# Altium PCB Mega16_SMT.PcbDoc (part 1 of 2)
Units mil, origin at the board's own origin, x right, y up, seen from the top; angles counter-clockwise.
Board outline 3000 x 4260 mil, 2 copper layers (Top Layer, Bottom Layer); 58 components, 55 nets, 251 pads, 26 vias.
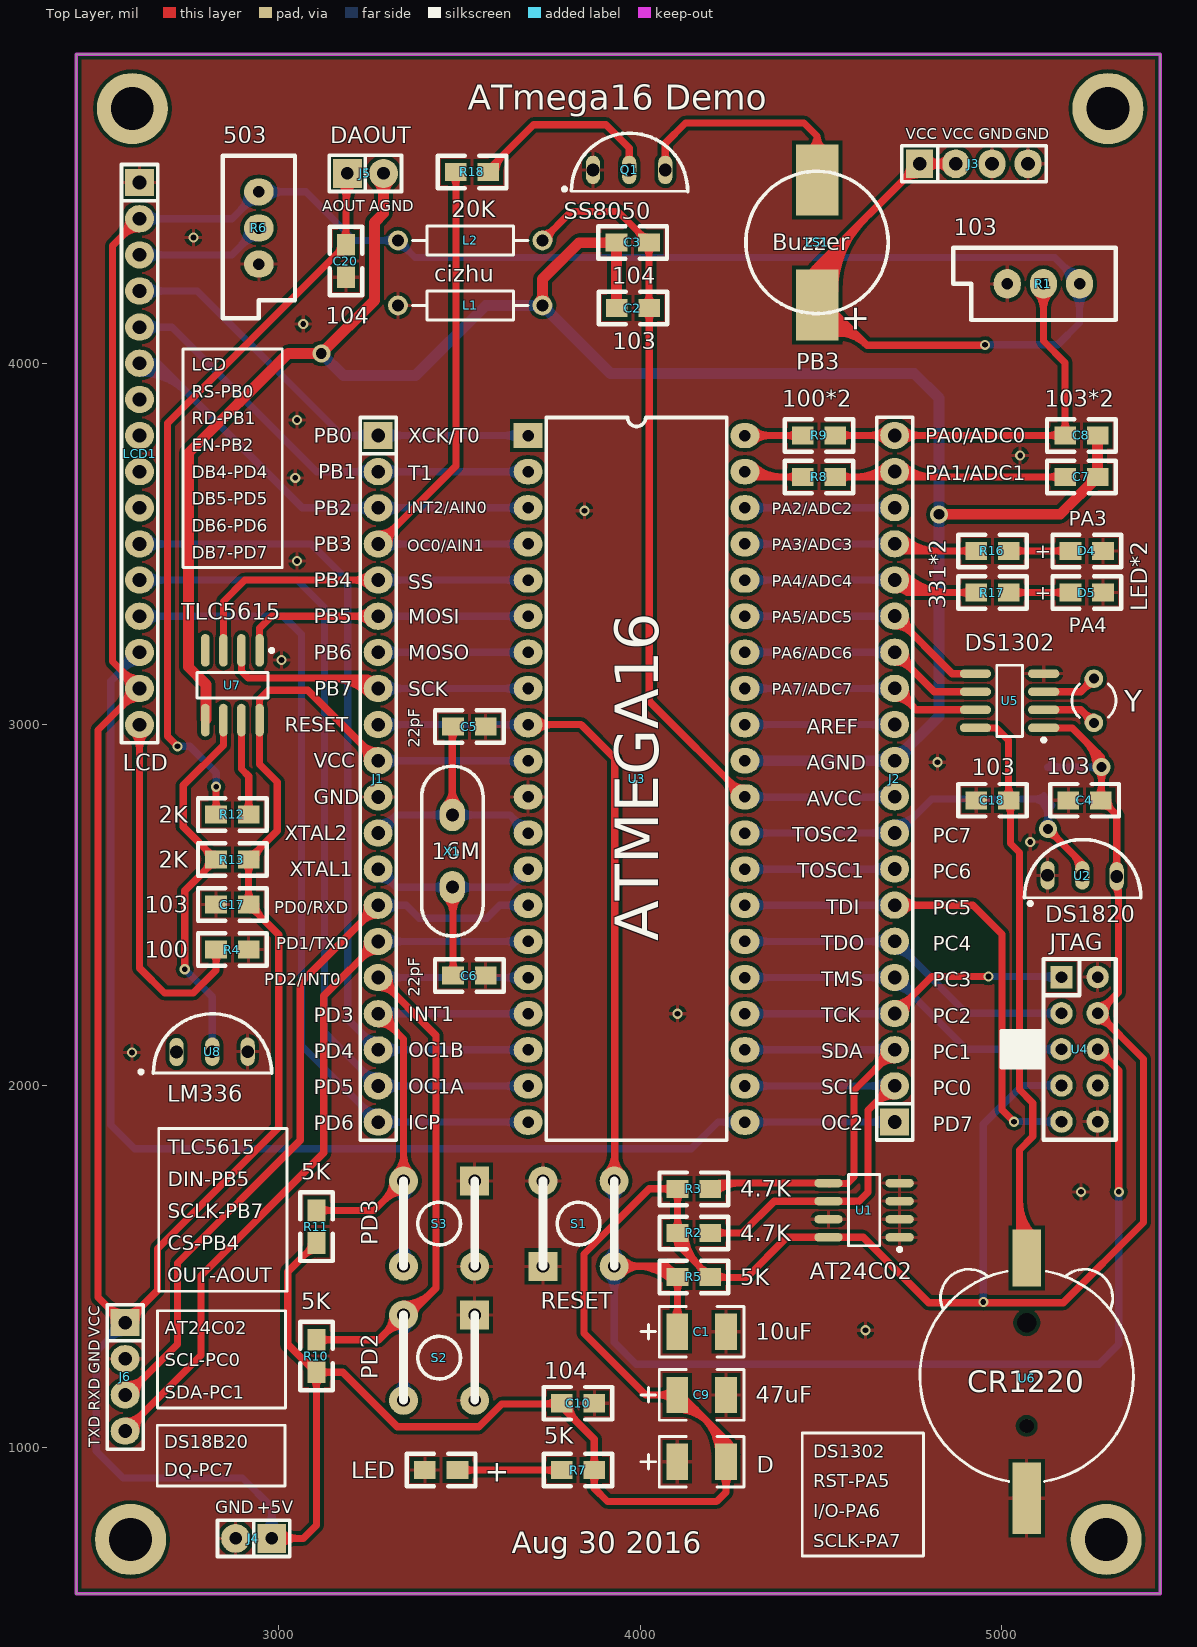
[diagram p0: Top Layer view]
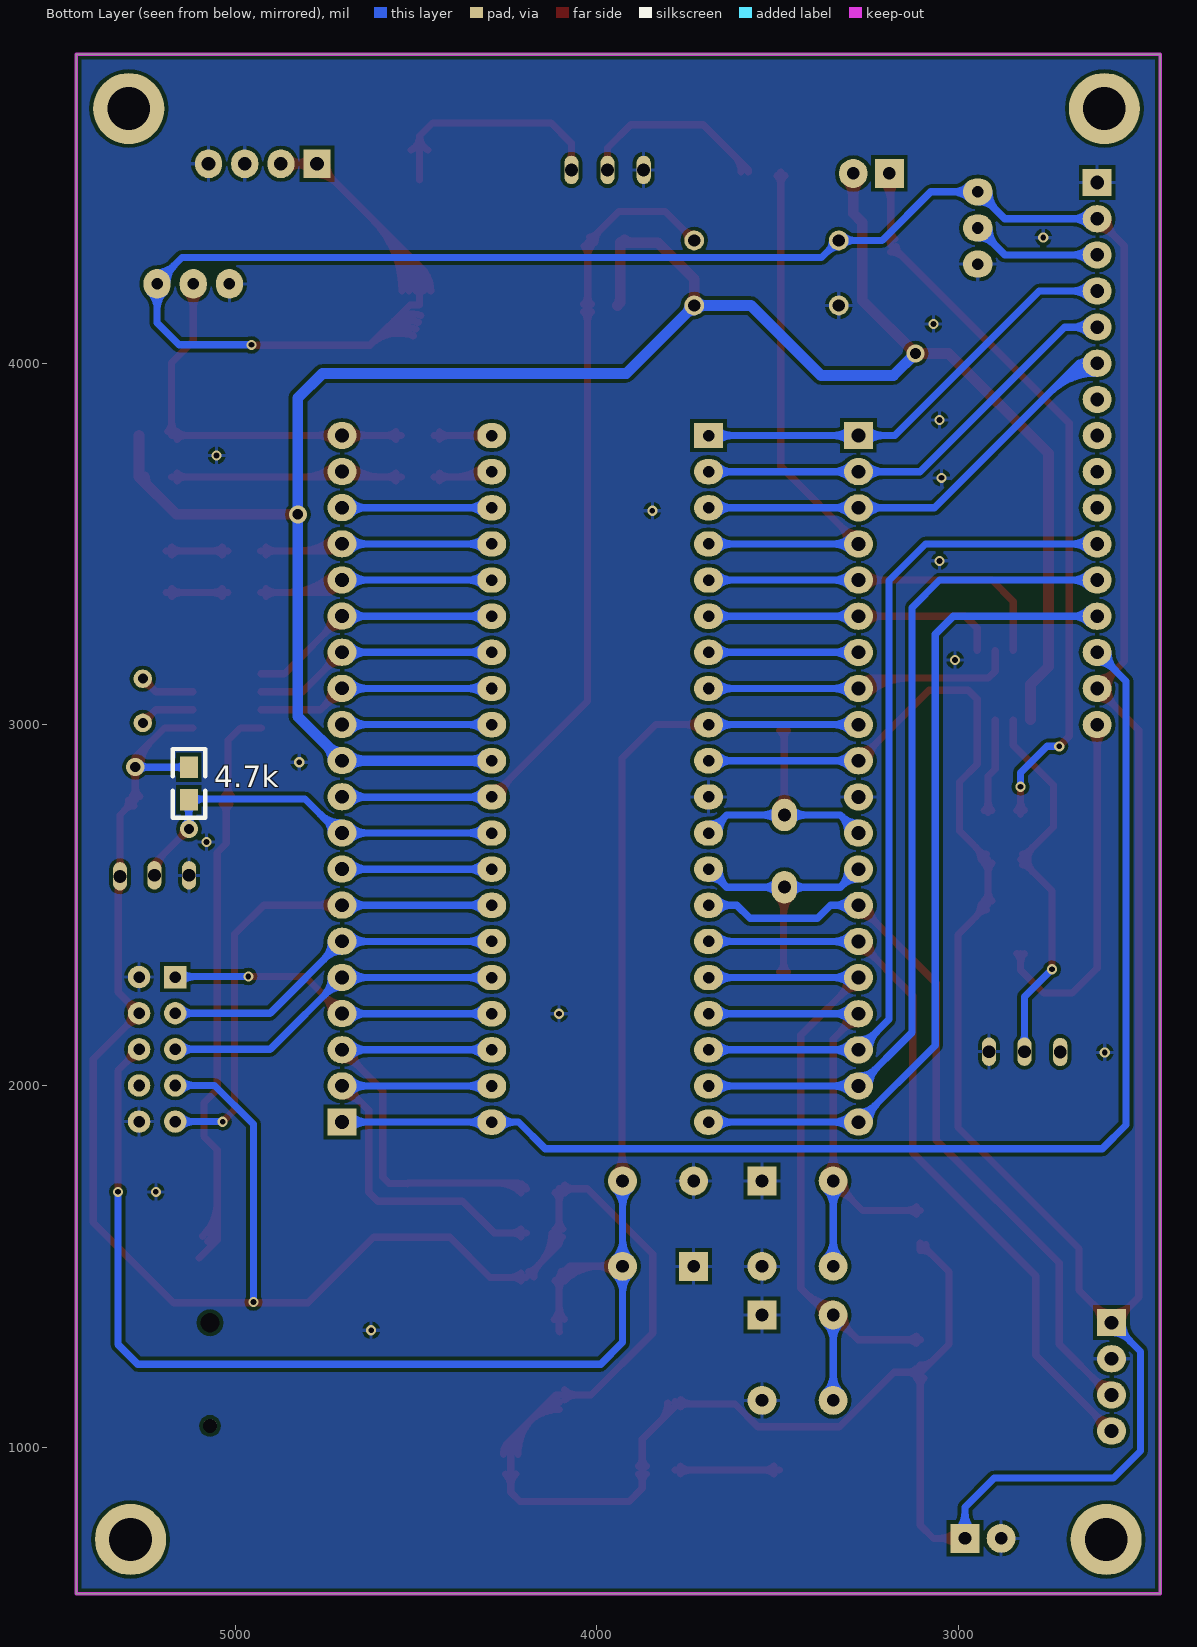
[diagram p1: Bottom Layer view, seen from below]

## Layer stack, top to bottom
Top Solder: solder mask 0.4, Solder Resist, Dk 3.5
Top Layer: signal copper 1.4
Dielectric1: dielectric 12.6, FR-4, Dk 4.8
Bottom Layer: signal copper 1.4
Bottom Solder: solder mask 0.4, Solder Resist, Dk 3.5

## Board outline
2440,595 5440,595 5440,4855 2440,4855

## Design rules (kind name [scope] priority, off if disabled: settings)
Clearance Clearance_Poly [InPolygon] p1: gap=10
Clearance Clearance_toKeepout [IsTrack vs OnLayer(KeepOut)] p2: gap=10
Clearance [All] p3: gap=10
FabricationTestpoint [(IsPad And (OnTopLayer Or OnBottomLayer))] p1: side=3 testpointundercomponent=TRUE minsize=40 maxsize=100 preferedsize=60 minholesize=0 maxholesize=40 preferedholesize=32 testpointgrid=1 allowsidetop=TRUE allowsidebottom=TRUE usegrid=TRUE gridtolerance=0.01
HoleSize [All] p1: absolutevalues=TRUE maxlimit=150 minlimit=1 maxpercent=80.000 minpercent=20.000
PolygonConnect [All] p1: connectstyle=Relief reliefconductorwidth=10 reliefentries=4 polygonreliefangle="90 Angle" airgapwidth=10
RoutingVias [All] p1: holewidth=28 width=50 viastyle="Through Hole" minholewidth=28 minwidth=50 maxholewidth=28 maxwidth=50
SilkToSilkClearance [All] p1: silktosilkclearance=8
SilkToSolderMaskClearance [IsPad] p1: minsilkscreentomaskgap=0 clearancetoexposedcopper=TRUE
SolderMaskExpansion [All] p1: expansion=4
Width Width_GND [InNet('GND')] p1: maxlimit=30 minlimit=30 preferedwidth=30
Width [All] p2: maxlimit=30 minlimit=20 preferedwidth=20
25 further rules are at their usual default settings.

## Components (designator, comment, footprint, x,y, rotation, side; value= is the part's Value field where it differs from the comment)
4.7k "4.7k" 0805 5128,2792 r90 bottom (schematic designator R19)
C1 "10uF" 1210 4103,1320 r0 top
C2 "103" 0805 3935,4152.34 r0 top
C3 "104" 0805 4025,4335 r180 top
C4 "103" 0805 5185,2790 r0 top
C5 "22pF" 0805 3573,2995 r180 top
C6 "22pF" 0805 3573,2306 r180 top
C7 "103" 0805 5176,3685 r0 top
C8 "103*2" 0805 5176,3799.8 r0 top
C9 "47uF" 1210 4103,1145 r0 top
C10 "104" 0805 3783.22,1121.46 r0 top
C17 "103" 0805 2826.39,2501.47 r0 top
C18 "103" 0805 5020.72,2791.2 r180 top
C20 "104" 0805 3186.6,4237.58 r90 top
D "D" 1210 4103,960 r0 top (schematic designator D3)
D4 "LED*2" 0805 5191,3480 r0 top
D5 "LED1" 0805 5191,3365 r0 top
J1 "CON20" SIP20 3275,3799.76 r270 top
J2 "CON20" SIP20 4705,1900.64 r90 top
J3 "CON4" SIP4 4774,4552 r0 top
J4 "+5V" SIP2 2980.75,748 r180 top
J5 "DAOUT" SIP2 3190,4525.4 r0 top
J6 "CON4" SIP4 2575,1345 r270 top
L1 "cizhu" AXIAL-0.4 3530,4160 r180 top
L2 "cizhu" AXIAL-0.4 3530,4340 r180 top
LCD1 "LCD" SIP16 2615,4500 r270 top
LED "POWER" 0805 3495,937.66 r180 top (schematic designator D2)
LS1 "Buzzer" Buzzer 4490,4334.4 r90 top
Q1 "SS8050" TO-92WIDE#1 3970,4535 r270 top
R1 "103" VR5 5216.22,4220 r180 top
R2 "4.7K" 0805 4103.58,1592.9 r0 top
R3 "4.7K" 0805 4194.3,1716 r180 top
R4 "100" 0805 2917.11,2378 r180 top
R5 "5K" 0805 4103.58,1471 r0 top
R6 "503" VR5 2945,4474.26 r270 top
R7 "5K" 0805 3873.93,937.66 r180 top
R8 "100" 0805 4450,3685 r0 top
R9 "100*2" 0805 4450,3799.8 r0 top
R10 "5K" 0805 3104,1298 r270 top
R11 "5K" 0805 3104,1656 r270 top
R12 "2K" 0805 2917.11,2752 r180 top
R13 "2K" 0805 2917.11,2627.33 r180 top
R16 "331*2" 0805 4930,3480 r0 top
R17 "331" 0805 4930,3365 r0 top
R18 "20K" 0805 3490,4528.8 r0 top
S1 "RESET" SW-PB 3830,1619 r90 top
S2 "PD2" SW-PB 3444,1248 r270 top
S3 "PD3" SW-PB 3444,1619 r270 top
U1 "AT24C02" SOP8_N 4620,1656.17 r180 top
U2 "DS1820" TO-92WIDE#2 5249,2580 r270 top
U3 "ATMEGA16" DIP40 3690,3800 r0 top
U4 "JTAG" IDC10 5166.49,2301.38 r270 top
U5 "DS1302" SOIC8N_N 50435,54390 r180 top
U6 "CR1220" CR1220 5070,859 r90 top
U7 "TLC5615" TLC5615 2872,3109 r270 top
U8 "LM336" TO-92WIDE#3 2853,2095 r270 top
X1 "16M" XTAL2 3481,2550 r90 top
Y "32.768K" R38 5256,3066 r180 top (schematic designator Y1)

## Footprints (in the part's own frame and the unit in brackets; to place one, negate y for a bottom-side part, rotate by r counter-clockwise, add the part's x,y. Pads: shape width x height; smd on the part's side, far side on the other; paste and mask are expansions set on the pad)
0805 [mil]
  rect 60x50 smd: 1(0.36,0.6) 2(90.36,0.6)
  silkscreen extent -50,-44 140,46
1210 [mil]
  rect 60x100 smd: 1(0,0) 2(135,0)
  silkscreen extent -100,-70 185,70
AXIAL-0.4 [mm]
  round 1.4 hole 0.85: 1(-5.08,0) 2(5.08,0)
  silkscreen extent -4.06,-1.02 4.06,1.02
Buzzer [mm]
  rect 5x3 smd: 1(-4.4,0) 2(4.4,0)
  silkscreen extent -5,-5 5,5
CR1220 [mm] "CR1220"
  rect 4x2 smd: 1(16.891,0)
  rect 5x2 smd: 2(0,0)
  round 1.2 hole 1.35: 3(12.336,0)
  round 0.95 hole 1: 4(5.086,0)
  silkscreen extent 1.19,-7.5 16.1,7.5
DIP40 [mil]
  rect 80x70 hole 32: 1(0.37,0)
  oval 80x70 hole 32: 2(0.37,-100) 3(0.37,-200) 4(0.37,-300) 5(0.37,-400) 6(0.37,-500) 7(0.37,-600) 8(0.37,-700) 9(0.37,-800) 10(0.37,-900) 11(0.37,-1000) 12(0.37,-1100) 13(0.37,-1200) 14(0.37,-1300) 15(0.37,-1400) 16(0.37,-1500) 17(0.37,-1600) 18(0.37,-1700) 19(0.37,-1800) 20(0.37,-1900) 21(600.37,-1900) 22(600.37,-1800) 23(600.37,-1700) 24(600.37,-1600) 25(600.37,-1500) 26(600.37,-1400) 27(600.37,-1300) 28(600.37,-1200) 29(600.37,-1100) 30(600.37,-1000) 31(600.37,-900) 32(600.37,-800) 33(600.37,-700) 34(600.37,-600) 35(600.37,-500) 36(600.37,-400) 37(600.37,-300) 38(600.37,-200) 39(600.37,-100) 40(600.37,0)
  silkscreen extent 50,-1950 550,50
IDC10 [mil] "SOIC, 8-Leads, Body 4.9x3.9mm, Pitch 1.27mm, IPC Medium Density"
  rect 62x62 hole 32: 1(-0.03,-0.13)
  round 62 hole 32: 2(-0.03,99.87) 3(99.97,-0.13) 4(99.97,99.87) 5(199.97,-0.13) 6(199.97,99.87) 7(299.97,-0.13) 8(299.97,99.87) 9(399.97,-0.13) 10(399.97,99.87)
  silkscreen extent -50,-50 450,150
R38 [mm] "Crystal, Thru-Hole; 2 Leads; Body 3.1 x 8.2 mm (Dia.xH)"
  round 1.3 hole 0.7: 1(0,1.55) 2(0,-1.55)
  silkscreen extent -1.55,-1.19 1.55,1.17
SIP2 [mil]
  rect 80x80 hole 35: 1(0,0)
  round 80 hole 35: 2(100,0)
  silkscreen extent -50,-50 150,50
SIP4 [mil]
  rect 75x80 hole 38: 1(-0.07,0.13)
  oval 75x80 hole 38: 2(99.93,0.13) 3(199.93,0.13) 4(299.93,0.13)
  silkscreen extent -50,-50 350,50
SIP16 [mil]
  rect 75x80 hole 38: 1(0,0)
  oval 75x80 hole 38: 2(100,0) 3(200,0) 4(300,0) 5(400,0) 6(500,0) 7(600,0) 8(700,0) 9(800,0) 10(900,0) 11(1000,0) 12(1100,0) 13(1200,0) 14(1300,0) 15(1400,0) 16(1500,0)
  silkscreen extent -50,-50 1550,50
SIP20 [mil]
  rect 75x80 hole 38: 1(-0.24,0.36)
  oval 75x80 hole 38: 2(99.76,0.36) 3(199.76,0.36) 4(299.76,0.36) 5(399.76,0.36) 6(499.76,0.36) 7(599.76,0.36) 8(699.76,0.36) 9(799.76,0.36) 10(899.76,0.36) 11(999.76,0.36) 12(1099.76,0.36) 13(1199.76,0.36) 14(1299.76,0.36) 15(1399.76,0.36) 16(1499.76,0.36) 17(1599.76,0.36) 18(1699.76,0.36) 19(1799.76,0.36) 20(1899.76,0.36)
  silkscreen extent -50,-50 1950,50
SOIC8N_N [mm] "SOIC, 8-Leads, Body 4.9x3.9mm, Pitch 1.27mm, IPC Medium Density"
  oval 2.2x0.6 smd: 1(1151.074,1305.535) 2(1151.074,1304.265) 3(1151.074,1302.995) 4(1151.074,1301.725) 5(1155.874,1301.725) 6(1155.874,1302.995) 7(1155.874,1304.265) 8(1155.874,1305.535)
  silkscreen extent 1150.95,1301.13 1154.37,1306.51, body extent 1151.52,1301.18 1155.42,1306.08, height 1.75
SOP8_N [mm] "SOIC, 8-Leads, Body 4.9x3.9mm, Pitch 1.27mm, IPC Medium Density"
  oval 2x0.6 smd: 1(-2.5,1.905) 2(-2.5,0.635) 3(-2.5,-0.635) 4(-2.5,-1.905) 5(2.5,-1.905) 6(2.5,-0.635) 7(2.5,0.635) 8(2.5,1.905)
  silkscreen extent -2.63,-2.5 1.1,2.88, body extent -2,-2.5 2,2.5, height 1.75
SW-PB [mil]
  rect 80x80 hole 35: 1(-118.11,98.42)
  round 80 hole 35: 2(-118.11,-98.43) 3(118.11,-98.43) 4(118.11,98.42)
  silkscreen extent -118,-98 118,98
TLC5615 [mm] "SOIC, 8-Leads, Body 4.90x3.90mm, Pitch 1.27mm, IPC Medium Density"
  oval 2.3x0.6 smd: 1(-2.45,1.905) 2(-2.45,0.635) 3(-2.45,-0.635) 4(-2.45,-1.905) 5(2.45,-1.905) 6(2.45,-0.635) 7(2.45,0.635) 8(2.45,1.905)
  silkscreen extent -2.57,-2.5 0.9,2.88, body extent -2,-2.5 2,2.5, height 1.75
TO-92WIDE#1 [mm]
  oval 2x1 hole 0.9: 1(0,-2.54) 2(0,0) 3(0,2.54)
  silkscreen extent 1.22,-4.67 1.5,4.11
TO-92WIDE#2 [mm]
  oval 2x1 hole 0.9: 1(-0.076,-3.073) 2(-0.076,-0.635) 3(0,1.778)
  silkscreen extent 1.5,-4.7 2.03,3.48
TO-92WIDE#3 [mm]
  oval 2x1 hole 0.9: 1(0.025,-3.448) 2(0,-0.933) 3(0,1.556)
  silkscreen extent 1.3,-6.07 1.55,3.25
VR5 [mil]
  oval 75x82 hole 32: 1(-0.14,0.24) 2(99.86,0.24) 3(199.86,0.24)
  silkscreen extent -100,-100 350,100
XTAL2 [mil]
  oval 90x70 hole 36: 1(0,0.36) 2(200,0.36)
  silkscreen extent -135,-85 335,85

## Part data
4.7k R2 R3 R4 R5 R7 R8 R9 R10 R11 R12 R13 R16 R17 R18: library part RES2
C1 C9: library part ELECTRO1
C2 C3 C4 C5 C6 C7 C8 C10 C17 C18 C20: library part CAP
D: library part DIODE, "Diode"
D4 D5 LED: library part LED
J1 J2: "Connector"
J4 J5: library part CON2, "Connector"
L1 L2: library part INDUCTOR, "Inductor"
LS1: "Buzzer Made in China"
Q1: library part 2N3904, "NPN General Purpose Amplifier"
R1 R6: library part POT, "Potentiometer"
S1 S2 S3: library part SW-PB4
U1: library part M24C01MN6, "1Kbit Serial I²C Bus EEPROM"
U2: "1-Wire Digital Thermometer"
U3: library part MEGA16, "MEGA16"
U5: library part DS1302ZN, "Trickle Charge Timekeeping Chip"
U8: library part LM336Z25, "LM336Z25"
X1: library part CRYSTAL
Y: library part XTAL, "Crystal Oscillator"

## Free pads (board coordinates)
  round 196.85 hole 118.11: 0(2595,4705) 1(5295,4705) 2(5290,745) 3(2590,745)

## Via types
v1: diameter 28, hole 16, Top Layer to Bottom Layer, 22 vias
v2: diameter 50, hole 28, Top Layer to Bottom Layer, tented both sides, 2 vias
v3: diameter 50, hole 30, Top Layer to Bottom Layer, 2 vias

## Nets (pads, with @x,y where several pads share a name; then routed paths per layer and width w, separated by ;. In a path a pad name is that pad's centre, name@x,y a point inside that pad or via, vN(x,y) a via of type N, cw(c..) or ccw(c..) an arc to the next point about the centre after c; other vN are vias at no path point)
AGND: C2.1 C3.2 C7.2 C8.2 J2.11 J5.2 L1.1 U3.31 U7.5 | length 6832.4
  Top Layer w30: U7.5@2799,3014.54 2799,3111 2750,3160 2750,3751 3026,4027 v3(3118,4027) 3265,4174 ; 3265,4178 3265,4390 3290,4415 J5.2@3290,4525.4 ; J5.2@3272.32,4507.72 cw(c3229.64,4465.05) 3290,4465.05 cw(c3350.36,4465.05) J5.2@3307.68,4507.72 ; L1.1@3721.12,4168.88 ccw(c3699.68,4190.32) 3730,4190.32 ccw(c3760.32,4190.32) L1.1@3738.88,4168.88 ; L1.1@3730,4160 3730,4233 3830.69,4333.69 C3.2@3934.64,4333.69 ; 3903.77,4333.69 ccw(c3903.77,4360.27) C3.2@3922.57,4341.47 ; 3934.64,4178.81 ccw(c3961.23,4178.81) C2.1@3942.43,4160.01 ; C3.2@3934.64,4334.4 C3.2@3934.64,4333.69 ; C2.1@3935.36,4167.94 3934.64,4168.65 C3.2@3934.64,4333.69 ; v3(4827,3582) 5163.11,3582 5266.36,3685.24 C7.2@5266.36,3685.6 C8.2@5266.36,3800.4 ; 5240.5,3659.39 ccw(c5214.29,3685.6) C7.2@5251.36,3685.6
  Bottom Layer w30: v3(3118,4027) 3179,3966 3379,3966 3573,4160 L1.1@3730,4160 3918,3972 4759,3972 4827,3904 v3(4827,3582) 4827,3022.76 J2.11@4704.64,2900.4 ; L1.1@3721.12,4151.12 ccw(c3699.68,4129.68) 3699.68,4160 ccw(c3699.68,4190.32) L1.1@3721.12,4168.88 ; L1.1@3730,4147.44 cw(c3730,4117.12) 3751.44,4138.56 cw(c3772.88,4160) L1.1@3742.56,4160 ; U3.31@4290.37,2900 J2.11@4704.64,2900 ; U3.31@4309.51,2885.86 cw(c4343.65,2851.72) 4343.65,2900 cw(c4343.65,2948.28) U3.31@4309.51,2914.14 ; 4646.85,2900 ccw(c4646.85,2955.69) J2.11@4686.23,2916.31 ; 4648.79,2900 cw(c4648.79,2847.05) J2.11@4686.23,2884.49 ; J2.11@4707.14,2922.9 ccw(c4707.14,2971.19) 4741.28,2937.04 ; J2.11@4729.64,2900.4 cw(c4790,2900.4) 4747.32,2943.08
AN0: C8.1 J2.20 R1.2 R9.2 | length 1563.7
  Top Layer w20: R9.2@4540.36,3800.4 J2.20@4704.64,3800.4 C8.1@5176.36,3800.4 5176.36,4001.64 5116.36,4061.64 R1.2@5116.36,4219.76 ; R9.2@4555.96,3789.8 cw(c4581.57,3764.19) 4581.57,3800.4 cw(c4581.57,3836.62) R9.2@4555.96,3811.01 ; J2.20@4682.7,3780.96 ccw(c4635.75,3734.01) 4635.75,3800.4 ccw(c4635.75,3866.79) J2.20@4682.7,3819.85 ; J2.20@4726.59,3780.96 cw(c4773.53,3734.01) 4773.53,3800.4 cw(c4773.53,3866.79) J2.20@4726.59,3819.85 ; R1.2@5096.91,4196.81 cw(c5049.97,4149.87) 5116.36,4149.87 cw(c5182.75,4149.87) R1.2@5135.8,4196.81 ; C8.1@5160.75,3789.8 ccw(c5135.14,3764.19) 5135.14,3800.4 ccw(c5135.14,3836.62) C8.1@5160.75,3811.01 ; C8.1@5165.75,3811.01 ccw(c5140.14,3836.62) 5176.36,3836.62 ccw(c5212.57,3836.62) C8.1@5186.96,3811.01
AN1: C7.1 J2.19 R8.2 | length 1053.6
  Top Layer w20: R8.2@4540.36,3685.6 4689.84,3685.6 J2.19@4704.64,3700.4 ; R8.2@4555.96,3674.99 cw(c4581.57,3649.39) 4581.57,3685.6 cw(c4581.57,3721.81) R8.2@4555.96,3696.21 ; 4600.02,3685.6 ccw(c4600.02,3802.53) J2.19@4682.7,3719.85 ; 4648.3,3685.6 ccw(c4648.3,3754.24) J2.19@4696.84,3705.71 ; J2.19@4704.64,3700.4 4719.4,3685.6 C7.1@5176.36,3685.6 ; J2.19@4712.45,3705.71 ccw(c4760.98,3754.24) 4760.98,3685.6 ; J2.19@4726.59,3719.85 ccw(c4809.27,3802.53) 4809.27,3685.6 ; C7.1@5160.75,3674.99 ccw(c5135.14,3649.39) 5135.14,3685.6 ccw(c5135.14,3721.81) C7.1@5160.75,3696.21
AOUT: C20.2 J5.1 R12.2 | length 2340.6
  Top Layer w20: v1(2720,2940) 2692,2968 2692,3833.94 C20.2@3186,4327.94 3186,4521.4 J5.1@3190,4525.4 ; R12.2@2816.14,2762.01 ccw(c2790.53,2787.61) 2826.75,2787.61 ccw(c2862.96,2787.61) R12.2@2837.35,2762.01 ; R12.2@2826.75,2751.4 2826.75,2827.75 v1(2827,2828) ; 3151.86,4293.79 cw(c3186,4259.65) C20.2@3186,4307.94 ; C20.2@3163.93,4305.87 ccw(c3146.86,4322.94) C20.2@3171,4322.94 ; J5.1@3168.79,4504.19 cw(c3127.23,4462.63) 3186,4462.63 ; C20.2@3175.39,4343.54 ccw(c3149.79,4369.15) 3186,4369.15 ccw(c3222.21,4369.15) C20.2@3196.61,4343.54 ; 3186,4443.32 cw(c3272.08,4443.32) J5.1@3211.21,4504.19
  Bottom Layer w20: v1(2720,2940) 2754,2940 2827,2867 v1(2827,2828)
AREF: J2.12 U3.32 | length 613.5
  Bottom Layer w20: U3.32@4290.37,3000 4704.24,3000 J2.12@4704.64,3000.4 ; U3.32@4313.05,2982.32 cw(c4355.73,2939.64) 4355.73,3000 cw(c4355.73,3060.36) U3.32@4313.05,3017.68 ; 4634.78,3000 ccw(c4634.78,3067.76) J2.12@4682.7,3019.85 ; 4636.72,3000 cw(c4636.72,2934.98) J2.12@4682.7,2980.96
AVCC: C2.2 C3.1 J2.10 L2.1 U3.30 | length 3010
  Top Layer w20: L2.1@3730,4340 3810,4420 3939.04,4420 C3.1@4024.64,4334.4 4024.64,4153.65 C2.2@4025.36,4152.94 4025.36,3065.01 U3.30@4290.37,2800 ; L2.1@3730,4357.56 ccw(c3730,4399.95) 3759.98,4369.98 ccw(c3789.95,4340) L2.1@3747.56,4340 ; 3990.5,4368.54 cw(c3956.36,4334.4) C3.1@4004.64,4334.4 ; C3.1@4002.57,4356.47 ccw(c4019.64,4373.54) C3.1@4019.64,4349.4 ; C3.1@4014.04,4323.8 cw(c3988.43,4298.19) 4024.64,4298.19 cw(c4060.86,4298.19) C3.1@4035.25,4323.8 ; C2.2@4014.75,4142.33 cw(c3989.14,4116.72) 4025.36,4116.72 cw(c4061.57,4116.72) C2.2@4035.96,4142.33 ; C2.2@4014.75,4163.54 ccw(c3990.87,4187.42) 4024.64,4187.42 ; 4024.64,4190.88 ccw(c4063.3,4190.88) C2.2@4035.96,4163.54 ; 4239.16,2851.21 cw(c4187.94,2800) U3.30@4260.37,2800 ; 4251.23,2839.14 ccw(c4285.37,2873.28) U3.30@4285.37,2825
  Bottom Layer w20: U3.30@4290.37,2799 J2.10@4704.64,2799 ; U3.30@4313.05,2782.32 cw(c4353.31,2742.06) 4353.31,2799 ; U3.30@4313.05,2817.68 ccw(c4358.14,2862.77) 4358.14,2799 ; 4632.37,2799 ccw(c4632.37,2870.18) J2.10@4682.7,2819.85 ; 4639.14,2799 cw(c4639.14,2737.4) J2.10@4682.7,2780.96
EN: J1.3 LCD1.6 U3.3 | length 1914.5
  Bottom Layer w20: LCD1.6@2615,4000 2665,4000 ; LCD1.6@2617.5,3972.5 cw(c2617.5,3791.43) 2745.53,3919.47 ; LCD1.6@2617.5,3992.5 cw(c2617.5,3859.72) 2711.39,3953.61 ; LCD1.6@2617.5,4012.5 cw(c2617.5,3928) 2677.25,3987.75 ; LCD1.6@2641.35,3986.31 cw(c2665,3972.73) 2665,4000 ; LCD1.6@2641.35,4013.69 ccw(c2665,4027.27) 2665,4000 ; J1.3@3253.41,3580.55 ccw(c3206.47,3533.61) 3206.47,3600 ccw(c3206.47,3666.39) J1.3@3253.41,3619.45 ; J1.3@3297.3,3580.55 cw(c3344.25,3533.61) 3344.25,3600 cw(c3344.25,3666.39) J1.3@3297.3,3619.45 ; U3.3@3667.69,3582.32 ccw(c3625.01,3539.64) 3625.01,3600 ccw(c3625.01,3660.36) U3.3@3667.69,3617.68 ; U3.3@3690.37,3600 J1.3@3275.36,3600 3065,3600 2665,4000
GND: C1.2 C4.1 C5.1 C6.1 C9.2 C10.2 C17.1 C18.2 C20.1 D4.2 D5.2 D.1 J1.11 J3.3 J3.4 J4.2 J6.2 L1.2 LCD1.1 LED.2 Q1.1 R1.3 R4.1 R6.3 S1.1 S1.4 S2.1 S2.4 S3.1 S3.4 U1.1 U1.2 U1.3 U1.4 U1.7 U2.1 U3.11 U4.2 U4.10 U5.4 U6.2 U8.3
  other v1: 4624,1324 5220,1707 2594,2093 4104,2200 5080,2675 4823,2896 3008,3179 3051,3453 3846,3592 3046,3683 5052,3745 3051,3843 3068,4109 2764,4348
NetD2_1: LED.1 R7.2 | length 402.7
  Top Layer w20: LED.1@3494.64,937.06 R7.2@3783.58,937.06 ; LED.1@3510.25,926.46 cw(c3535.85,900.85) 3535.85,937.06 cw(c3535.85,973.28) LED.1@3510.25,947.67 ; R7.2@3767.97,926.46 ccw(c3742.36,900.85) 3742.36,937.06 ccw(c3742.36,973.28) R7.2@3767.97,947.67
NetD4_1: D4.1 R16.2 | length 284.8
  Top Layer w20: R16.2@5020.36,3480.6 D4.1@5191.36,3480.6 ; R16.2@5035.96,3469.99 cw(c5061.57,3444.39) 5061.57,3480.6 cw(c5061.57,3516.81) R16.2@5035.96,3491.21 ; D4.1@5175.75,3469.99 ccw(c5150.14,3444.39) 5150.14,3480.6 ccw(c5150.14,3516.81) D4.1@5175.75,3491.21
NetD5_1: D5.1 R17.2 | length 284.8
  Top Layer w20: R17.2@5020.36,3365.6 D5.1@5191.36,3365.6 ; R17.2@5035.96,3354.99 cw(c5061.57,3329.39) 5061.57,3365.6 cw(c5061.57,3401.81) R17.2@5035.96,3376.21 ; D5.1@5175.75,3354.99 ccw(c5150.14,3329.39) 5150.14,3365.6 ccw(c5150.14,3401.81) D5.1@5175.75,3376.21
NetLCD1_16: LCD1.16 R4.2 | length 1150.7
  Top Layer w20: LCD1.16@2595.55,2980.55 cw(c2548.61,2933.61) 2615,2933.61 cw(c2681.39,2933.61) LCD1.16@2634.45,2980.55 ; LCD1.16@2610,2995 LCD1.16@2615,3000 2615,2326 ; 2618,2323 2684,2257 2763.6,2257 2826.75,2320.15 R4.2@2826.75,2366.4 ; R4.2@2816.14,2366.8 cw(c2790.53,2341.19) 2826.75,2341.19 cw(c2862.96,2341.19) R4.2@2837.35,2366.8
NetLS1_2: LS1.2 Q1.3 | length 785.1
  Top Layer w20: Q1.3@4063.15,4561.53 ccw(c4046.62,4578.07) 4070,4578.07 ccw(c4093.38,4578.07) Q1.3@4076.85,4561.53 ; Q1.3@4070,4535 4070,4609 4126,4665 4454,4665 4490,4629 ; LS1.2@4466.8,4590.22 ccw(c4446,4629) 4490,4629 ; LS1.2@4490,4507.63 4490,4629 ; LS1.2@4513.2,4590.22 cw(c4534,4629) 4490,4629
NetQ1_2: Q1.2 R18.2 | length 620.7
  Top Layer w20: R18.2@3580.36,4529.4 3580.36,4535.36 3705,4660 3906,4660 3970,4596 Q1.2@3970,4535 ; R18.2@3600.36,4529.4 cw(c3663.02,4529.4) 3618.71,4573.71 ; Q1.2@3963.15,4561.53 ccw(c3946.62,4578.07) 3970,4578.07 ccw(c3993.38,4578.07) Q1.2@3976.85,4561.53
NetR9_1: R9.1 U3.40 | length 311.8
  Top Layer w20: U3.40@4290.37,3800 4449.96,3800 R9.1@4450.36,3800.4 ; U3.40@4313.05,3782.32 cw(c4355.73,3739.64) 4355.73,3800 cw(c4355.73,3860.36) U3.40@4313.05,3817.68 ; 4408.17,3800 ccw(c4408.17,3837.59) R9.1@4434.75,3811.01 ; 4410.12,3800 cw(c4410.12,3765.16) R9.1@4434.75,3789.8
NetR12_1: R12.1 U7.7 | length 321.1
  Top Layer w20: U7.7@2897,3012.54 2897,2877 2917,2857 R12.1@2917,2756.65 ; R12.1@2906.14,2762.01 ccw(c2879.93,2788.22) 2917,2788.22 ; 2917,2787 ccw(c2952.35,2787) R12.1@2927.35,2762.01
NetR13_2: R13.2 U7.6 U8.2 | length 1219.1
  Top Layer w20: v1(2740,2323) 2740,2539.99 R13.2@2826.75,2626.73 2736,2717.48 2736,2832 2847,2943 U7.6@2847,3012.54 ; 2792.61,2592.59 ccw(c2758.46,2626.73) 2806.75,2626.73 ccw(c2758.46,2626.73) 2792.61,2660.88 ; R13.2@2804.68,2604.66 cw(c2821.75,2587.59) R13.2@2821.75,2611.73 ; R13.2@2804.68,2648.81 ccw(c2821.75,2665.88) R13.2@2821.75,2641.73
  Bottom Layer w20: v1(2740,2323) 2816.25,2246.75 U8.2@2816.25,2095 ; U8.2@2809.4,2121.53 ccw(c2792.87,2138.07) 2816.25,2138.07 ccw(c2839.63,2138.07) U8.2@2823.1,2121.53
NetU5_2: U5.2 Y.1 | length 212.9
  Top Layer w20: U5.2@5117.13,3041 5219.98,3041 Y.1@5256,3004.98 ; Y.1@5240.41,3004.98 ccw(c5202.77,3004.98) 5229.39,3031.59 ccw(c5256,3058.21) Y.1@5256,3020.57
NetU5_3: U5.3 Y.2 | length 212.9
  Top Layer w20: U5.3@5117.13,3091 5219.98,3091 Y.2@5256,3127.02 ; Y.2@5240.41,3127.02 cw(c5202.77,3127.02) 5229.39,3100.41 cw(c5256,3073.79) Y.2@5256,3111.43
PA1: R8.1 U3.39 | length 356.9
  Top Layer w20: U3.39@4290.37,3700 4304.77,3685.6 R8.1@4450.36,3685.6 ; U3.39@4298.91,3703.54 ccw(c4342.21,3746.84) 4342.21,3685.6 ; U3.39@4313.05,3717.68 ccw(c4390.49,3795.12) 4390.49,3685.6 ; R8.1@4434.75,3674.99 ccw(c4409.14,3649.39) 4409.14,3685.6 ccw(c4409.14,3721.81) R8.1@4434.75,3696.21
PA2: J2.18 U3.38 | length 613
  Bottom Layer w20: U3.38@4290.37,3600 J2.18@4704.24,3600 ; U3.38@4313.05,3582.32 cw(c4355.73,3539.64) 4355.73,3600 cw(c4355.73,3660.36) U3.38@4313.05,3617.68 ; 4634.78,3600 ccw(c4634.78,3667.76) J2.18@4682.7,3619.85 ; 4636.72,3600 cw(c4636.72,3534.98) J2.18@4682.7,3580.96
PA3: J2.17 R16.1 U3.37 | length 1076.3
  Top Layer w20: J2.17@4704.64,3500.4 4724.44,3480.6 R16.1@4930.36,3480.6 ; J2.17@4712.45,3505.71 ccw(c4773.05,3566.31) 4773.05,3480.6 ; J2.17@4726.59,3519.85 ccw(c4821.34,3614.6) 4821.34,3480.6 ; R16.1@4914.75,3469.99 ccw(c4889.14,3444.39) 4889.14,3480.6 ccw(c4889.14,3516.81) R16.1@4914.75,3491.21
  Bottom Layer w20: U3.37@4290.37,3500 J2.17@4704.24,3500 ; U3.37@4313.05,3482.32 cw(c4355.73,3439.64) 4355.73,3500 cw(c4355.73,3560.36) U3.37@4313.05,3517.68 ; 4634.78,3500 ccw(c4634.78,3567.76) J2.17@4682.7,3519.85 ; 4636.72,3500 cw(c4636.72,3434.98) J2.17@4682.7,3480.96
PA4: J2.16 R17.1 U3.36 | length 1290.4
  Top Layer w20: J2.16@4698.3,3391.56 ccw(c4760.98,3454.24) 4760.98,3365.6 ; J2.16@4704.64,3400.4 4739.44,3365.6 ; J2.16@4712.45,3405.71 ccw(c4809.27,3502.53) 4809.27,3365.6 ; J2.16@4712.83,3373.5 cw(c4718.86,3345.02) 4739.44,3365.6 ; J2.16@4726.59,3419.85 ccw(c4857.55,3550.81) 4857.55,3365.6 ; J2.16@4733.25,3391.75 ccw(c4757.54,3383.7) 4739.44,3365.6 ; R17.1@4914.75,3354.99 ccw(c4889.14,3329.39) 4889.14,3365.6 ccw(c4889.14,3401.81) R17.1@4914.75,3376.21 ; R17.1@4930.36,3365.6 4739.44,3365.6
  Bottom Layer w20: U3.36@4290.37,3400 4704.24,3400 J2.16@4704.64,3400.4 ; U3.36@4313.05,3382.32 cw(c4355.73,3339.64) 4355.73,3400 cw(c4355.73,3460.36) U3.36@4313.05,3417.68 ; 4634.78,3400 ccw(c4634.78,3467.76) J2.16@4682.7,3419.85 ; 4636.72,3400 cw(c4636.72,3334.98) J2.16@4682.7,3380.96
PA5: J2.15 U3.35 U5.5 | length 1007.4
  Top Layer w20: J2.15@4704.64,3300.4 4864.04,3141 U5.5@4928.15,3141 ; J2.15@4707.14,3272.9 cw(c4707.14,3212.55) 4749.82,3255.22 ; J2.15@4734.64,3300.4 ccw(c4807.07,3300.4) 4755.86,3249.19
  Bottom Layer w20: U3.35@4290.37,3300 4704.24,3300 J2.15@4704.64,3300.4 ; U3.35@4313.05,3282.32 cw(c4355.73,3239.64) 4355.73,3300 cw(c4355.73,3360.36) U3.35@4313.05,3317.68 ; 4634.78,3300 ccw(c4634.78,3367.76) J2.15@4682.7,3319.85 ; 4636.72,3300 cw(c4636.72,3234.98) J2.15@4682.7,3280.96
PA6: J2.14 U3.34 U5.6 | length 986.6
  Top Layer w20: J2.14@4704.64,3200.4 4814.04,3091 U5.6@4928.15,3091 ; J2.14@4707.14,3172.9 cw(c4707.14,3112.55) 4749.82,3155.22 ; J2.14@4734.64,3200.4 ccw(c4807.07,3200.4) 4755.86,3149.19
  Bottom Layer w20: U3.34@4290.37,3200 4704.24,3200 J2.14@4704.64,3200.4 ; U3.34@4313.05,3182.32 cw(c4355.73,3139.64) 4355.73,3200 cw(c4355.73,3260.36) U3.34@4313.05,3217.68 ; 4634.78,3200 ccw(c4634.78,3267.76) J2.14@4682.7,3219.85 ; 4636.72,3200 cw(c4636.72,3134.98) J2.14@4682.7,3180.96
PA7: J2.13 U3.33 U5.7 | length 965.4
  Top Layer w20: J2.13@4704.64,3100.4 4764.04,3041 U5.7@4928.15,3041 ; J2.13@4707.14,3072.9 cw(c4707.14,3012.55) 4749.82,3055.22 ; J2.13@4734.64,3100.4 ccw(c4807.07,3100.4) 4755.86,3049.19
  Bottom Layer w20: U3.33@4290.37,3100 J2.13@4704.24,3100 ; U3.33@4313.05,3082.32 cw(c4355.73,3039.64) 4355.73,3100 cw(c4355.73,3160.36) U3.33@4313.05,3117.68 ; 4634.78,3100 ccw(c4634.78,3167.76) J2.13@4682.7,3119.85 ; 4636.72,3100 cw(c4636.72,3034.98) J2.13@4682.7,3080.96
PB3: J1.4 R18.1 U3.4 | length 1893.7
  Top Layer w20: J1.4@3275.36,3500 3490.36,3715 R18.1@3490.36,4529.4 ; J1.4@3277.86,3527.5 ccw(c3277.86,3587.86) 3320.54,3545.18 ; J1.4@3305.36,3500 cw(c3377.78,3500) 3326.57,3551.21 ; R18.1@3479.75,4518.8 cw(c3454.14,4493.19) 3490.36,4493.19 cw(c3526.57,4493.19) R18.1@3500.96,4518.8
  Bottom Layer w20: J1.4@3275.36,3500 U3.4@3690.37,3500 ; J1.4@3297.3,3480.55 cw(c3344.25,3433.61) 3344.25,3500 cw(c3344.25,3566.39) J1.4@3297.3,3519.45 ; U3.4@3667.69,3482.32 ccw(c3625.01,3439.64) 3625.01,3500 ccw(c3625.01,3560.36) U3.4@3667.69,3517.68
PB4: J1.5 U3.5 U7.3 | length 1306.7
  Top Layer w20: U7.3@2847,3205.46 2847,3341 2906,3400 J1.5@3275.36,3400 ; J1.5@3253.41,3380.55 ccw(c3206.47,3333.61) 3206.47,3400 ccw(c3206.47,3466.39) J1.5@3253.41,3419.45
  Bottom Layer w20: J1.5@3275.36,3400 U3.5@3690.37,3400 ; J1.5@3297.3,3380.55 cw(c3344.25,3333.61) 3344.25,3400 cw(c3344.25,3466.39) J1.5@3297.3,3419.45 ; U3.5@3667.69,3382.32 ccw(c3625.01,3339.64) 3625.01,3400 ccw(c3625.01,3460.36) U3.5@3667.69,3417.68
PB5: J1.6 U3.6 U7.1 | length 1122
  Top Layer w20: U7.1@2947,3205.46 2947,3267 2980,3300 J1.6@3275.36,3300 ; J1.6@3253.41,3280.55 ccw(c3206.47,3233.61) 3206.47,3300 ccw(c3206.47,3366.39) J1.6@3253.41,3319.45
  Bottom Layer w20: J1.6@3275.36,3300 U3.6@3690.37,3300 ; J1.6@3297.3,3280.55 cw(c3344.25,3233.61) 3344.25,3300 cw(c3344.25,3366.39) J1.6@3297.3,3319.45 ; U3.6@3667.69,3282.32 ccw(c3625.01,3239.64) 3625.01,3300 ccw(c3625.01,3360.36) U3.6@3667.69,3317.68
PB6: J1.7 U3.7 | length 614.1
  Bottom Layer w20: J1.7@3275.36,3200 U3.7@3690.37,3200 ; J1.7@3297.3,3180.55 cw(c3344.25,3133.61) 3344.25,3200 cw(c3344.25,3266.39) J1.7@3297.3,3219.45 ; U3.7@3667.69,3182.32 ccw(c3625.01,3139.64) 3625.01,3200 ccw(c3625.01,3260.36) U3.7@3667.69,3217.68
PB7: J1.8 U3.8 U7.2 | length 1380.7
  Top Layer w20: U7.2@2897,3205.46 2897,3148 2916,3129 3246.36,3129 ; 3136.45,3129 cw(c3136.45,2963.6) J1.8@3253.41,3080.55 ; 3184.74,3129 cw(c3184.74,3011.88) J1.8@3267.55,3094.7 ; 3233.02,3129 cw(c3233.02,3060.17) J1.8@3281.7,3108.84 ; J1.8@3248.67,3113.09 ccw(c3236.85,3119.49) 3246.36,3129 ; J1.8@3262.78,3125.59 cw(c3257.17,3139.81) 3246.36,3129 ; J1.8@3275.36,3100 3246.36,3129
  Bottom Layer w20: J1.8@3275.36,3100 U3.8@3690.37,3100 ; J1.8@3297.3,3080.55 cw(c3344.25,3033.61) 3344.25,3100 cw(c3344.25,3166.39) J1.8@3297.3,3119.45 ; U3.8@3667.69,3082.32 ccw(c3625.01,3039.64) 3625.01,3100 ccw(c3625.01,3160.36) U3.8@3667.69,3117.68
PC0: J2.2 R2.2 U1.6 U3.22 | length 1586.8
  Top Layer w20: R2.2@4193.94,1593.5 4283.5,1593.5 4371.17,1681.17 U1.6@4521.57,1681.17 4606.17,1681.17 4631,1706 4631,1933 4698.4,2000.4 J2.2@4704.64,2000.4 ; R2.2@4209.54,1582.89 cw(c4235.15,1557.29) 4235.15,1593.5 cw(c4235.15,1629.71) R2.2@4209.54,1604.11 ; 4648.81,1950.81 cw(c4702.14,1897.48) J2.2@4702.14,1972.9 ; 4657.84,1959.84 ccw(c4617.28,2000.4) J2.2@4674.64,2000.4
  Bottom Layer w20: U3.22@4290.37,2000 J2.2@4704.64,2000 ; U3.22@4313.05,1982.32 cw(c4355.73,1939.64) 4355.73,2000 cw(c4355.73,2060.36) U3.22@4313.05,2017.68 ; 4634.78,2000 ccw(c4634.78,2067.76) J2.2@4682.7,2019.85 ; 4636.72,2000 cw(c4636.72,1934.98) J2.2@4682.7,1980.96
PC1: J2.3 R3.1 U1.5 U3.23 | length 1652
  Top Layer w20: R3.1@4193.94,1715.4 4210.4,1715.4 4226.17,1731.17 ; R3.1@4195.4,1718.94 cw(c4224.92,1689.42) 4224.92,1731.17 ; R3.1@4206.32,1728.46 ccw(c4214.46,1742.87) 4226.16,1731.16 ; R3.1@4209.54,1704.8 cw(c4273.21,1641.13) 4273.21,1731.17 ; U1.5@4521.57,1731.17 4226.17,1731.17 ; U1.5@4523.74,1729 4524.74,1730 4574,1730 4592,1748 4592,1987.76 J2.3@4704.64,2100.4 ; 4653.43,2049.19 ccw(c4602.22,2100.4) J2.3@4674.64,2100.4 ; 4659.46,2055.22 cw(c4702.14,2012.55) J2.3@4702.14,2072.9
  Bottom Layer w20: U3.23@4290.37,2100 J2.3@4704.64,2100 ; U3.23@4313.05,2082.32 cw(c4355.73,2039.64) 4355.73,2100 cw(c4355.73,2160.36) U3.23@4313.05,2117.68 ; 4634.78,2100 ccw(c4634.78,2167.76) J2.3@4682.7,2119.85 ; 4636.72,2100 cw(c4636.72,2034.98) J2.3@4682.7,2080.96
PC2: J2.4 U3.24 U4.1 | length 1301.5
  Top Layer w20: J2.4@4704.64,2200.4 4807.24,2303 v1(4964,2303) ; J2.4@4707.14,2227.9 ccw(c4707.14,2288.26) 4749.82,2245.58 ; J2.4@4734.64,2200.4 cw(c4807.07,2200.4) 4755.86,2251.62
  Bottom Layer w20: U3.24@4290.37,2200 J2.4@4704.64,2200 ; U3.24@4313.05,2182.32 cw(c4355.73,2139.64) 4355.73,2200 cw(c4355.73,2260.36) U3.24@4313.05,2217.68 ; 4634.78,2200 ccw(c4634.78,2267.76) J2.4@4682.7,2219.85 ; 4636.72,2200 cw(c4636.72,2134.98) J2.4@4682.7,2180.96 ; v1(4964,2303) U4.1@5166.36,2303 ; 5111.8,2303 cw(c5111.8,2246.85) U4.1@5151.51,2286.55 ; 5119.52,2303 ccw(c5119.52,2348.24) U4.1@5151.51,2316.25
PC3: J2.5 U3.25 U4.5 | length 1341.4
  Bottom Layer w20: U3.25@4290.37,2300 J2.5@4704.64,2300 ; U3.25@4313.05,2282.32 cw(c4355.73,2239.64) 4355.73,2300 cw(c4355.73,2360.36) U3.25@4313.05,2317.68 ; 4634.78,2300 ccw(c4634.78,2367.76) J2.5@4682.7,2319.85 ; 4636.72,2300 cw(c4636.72,2234.98) J2.5@4682.7,2280.96 ; J2.5@4704.64,2300.4 4903.64,2101.4 U4.5@5166.36,2101.4 ; J2.5@4707.14,2272.9 cw(c4707.14,2212.55) 4749.82,2255.22 ; J2.5@4734.64,2300.4 ccw(c4807.07,2300.4) 4755.86,2249.19 ; U4.5@5151.51,2086.55 ccw(c5115.66,2050.7) 5115.66,2101.4 ccw(c5115.66,2152.1) U4.5@5151.51,2116.25
PC4: J2.6 U3.26 U4.3 | length 1341.4
  Bottom Layer w20: U3.26@4290.37,2400 J2.6@4704.64,2400 ; U3.26@4313.05,2382.32 cw(c4355.73,2339.64) 4355.73,2400 cw(c4355.73,2460.36) U3.26@4313.05,2417.68 ; 4634.78,2400 ccw(c4634.78,2467.76) J2.6@4682.7,2419.85 ; 4636.72,2400 cw(c4636.72,2334.98) J2.6@4682.7,2380.96 ; J2.6@4704.64,2400.4 4903.64,2201.4 U4.3@5166.36,2201.4 ; J2.6@4707.14,2372.9 cw(c4707.14,2312.55) 4749.82,2355.22 ; J2.6@4734.64,2400.4 ccw(c4807.07,2400.4) 4755.86,2349.19 ; U4.3@5151.51,2186.55 ccw(c5115.66,2150.7) 5115.66,2201.4 ccw(c5115.66,2252.1) U4.3@5151.51,2216.25
PC5: J2.7 U3.27 U4.9 | length 1792
  Top Layer w20: J2.7@4704.64,2500.4 4921.6,2500.4 5002,2420 5002,1934 v1(5035,1901) ; J2.7@4726.59,2480.96 cw(c4773.53,2434.01) 4773.53,2500.4 cw(c4773.53,2566.79) J2.7@4726.59,2519.85
  Bottom Layer w20: U3.27@4290.37,2500 J2.7@4704.64,2500 ; U3.27@4313.05,2482.32 cw(c4355.73,2439.64) 4355.73,2500 cw(c4355.73,2560.36) U3.27@4313.05,2517.68 ; 4634.78,2500 ccw(c4634.78,2567.76) J2.7@4682.7,2519.85 ; 4636.72,2500 cw(c4636.72,2434.98) J2.7@4682.7,2480.96 ; v1@5035,1901.4 U4.9@5166.36,1901.4 ; U4.9@5151.51,1886.55 ccw(c5115.66,1850.7) 5115.66,1901.4 ccw(c5115.66,1952.1) U4.9@5151.51,1916.25
PC6: J2.8 U3.28 | length 613.4
  Bottom Layer w20: U3.28@4290.37,2600 J2.8@4704.64,2600 ; U3.28@4313.05,2582.32 cw(c4355.73,2539.64) 4355.73,2600 cw(c4355.73,2660.36) U3.28@4313.05,2617.68 ; 4634.78,2600 ccw(c4634.78,2667.76) J2.8@4682.7,2619.85 ; 4636.72,2600 cw(c4636.72,2534.98) J2.8@4682.7,2580.96